# Altium PCB Sampler_DIOT.PCBDOC (part 7 of 9)
Units mm, origin at the board's own origin, x right, y up, seen from the top; angles counter-clockwise.
Board outline 222.17 x 100 mm, 4 copper layers (Top, GP1(GND), L3, Bot), stack 1.672 mm thick; 664 components, 411 nets, 2128 pads, 911 vias.
Unrouted connection lines stored in the file: 4.
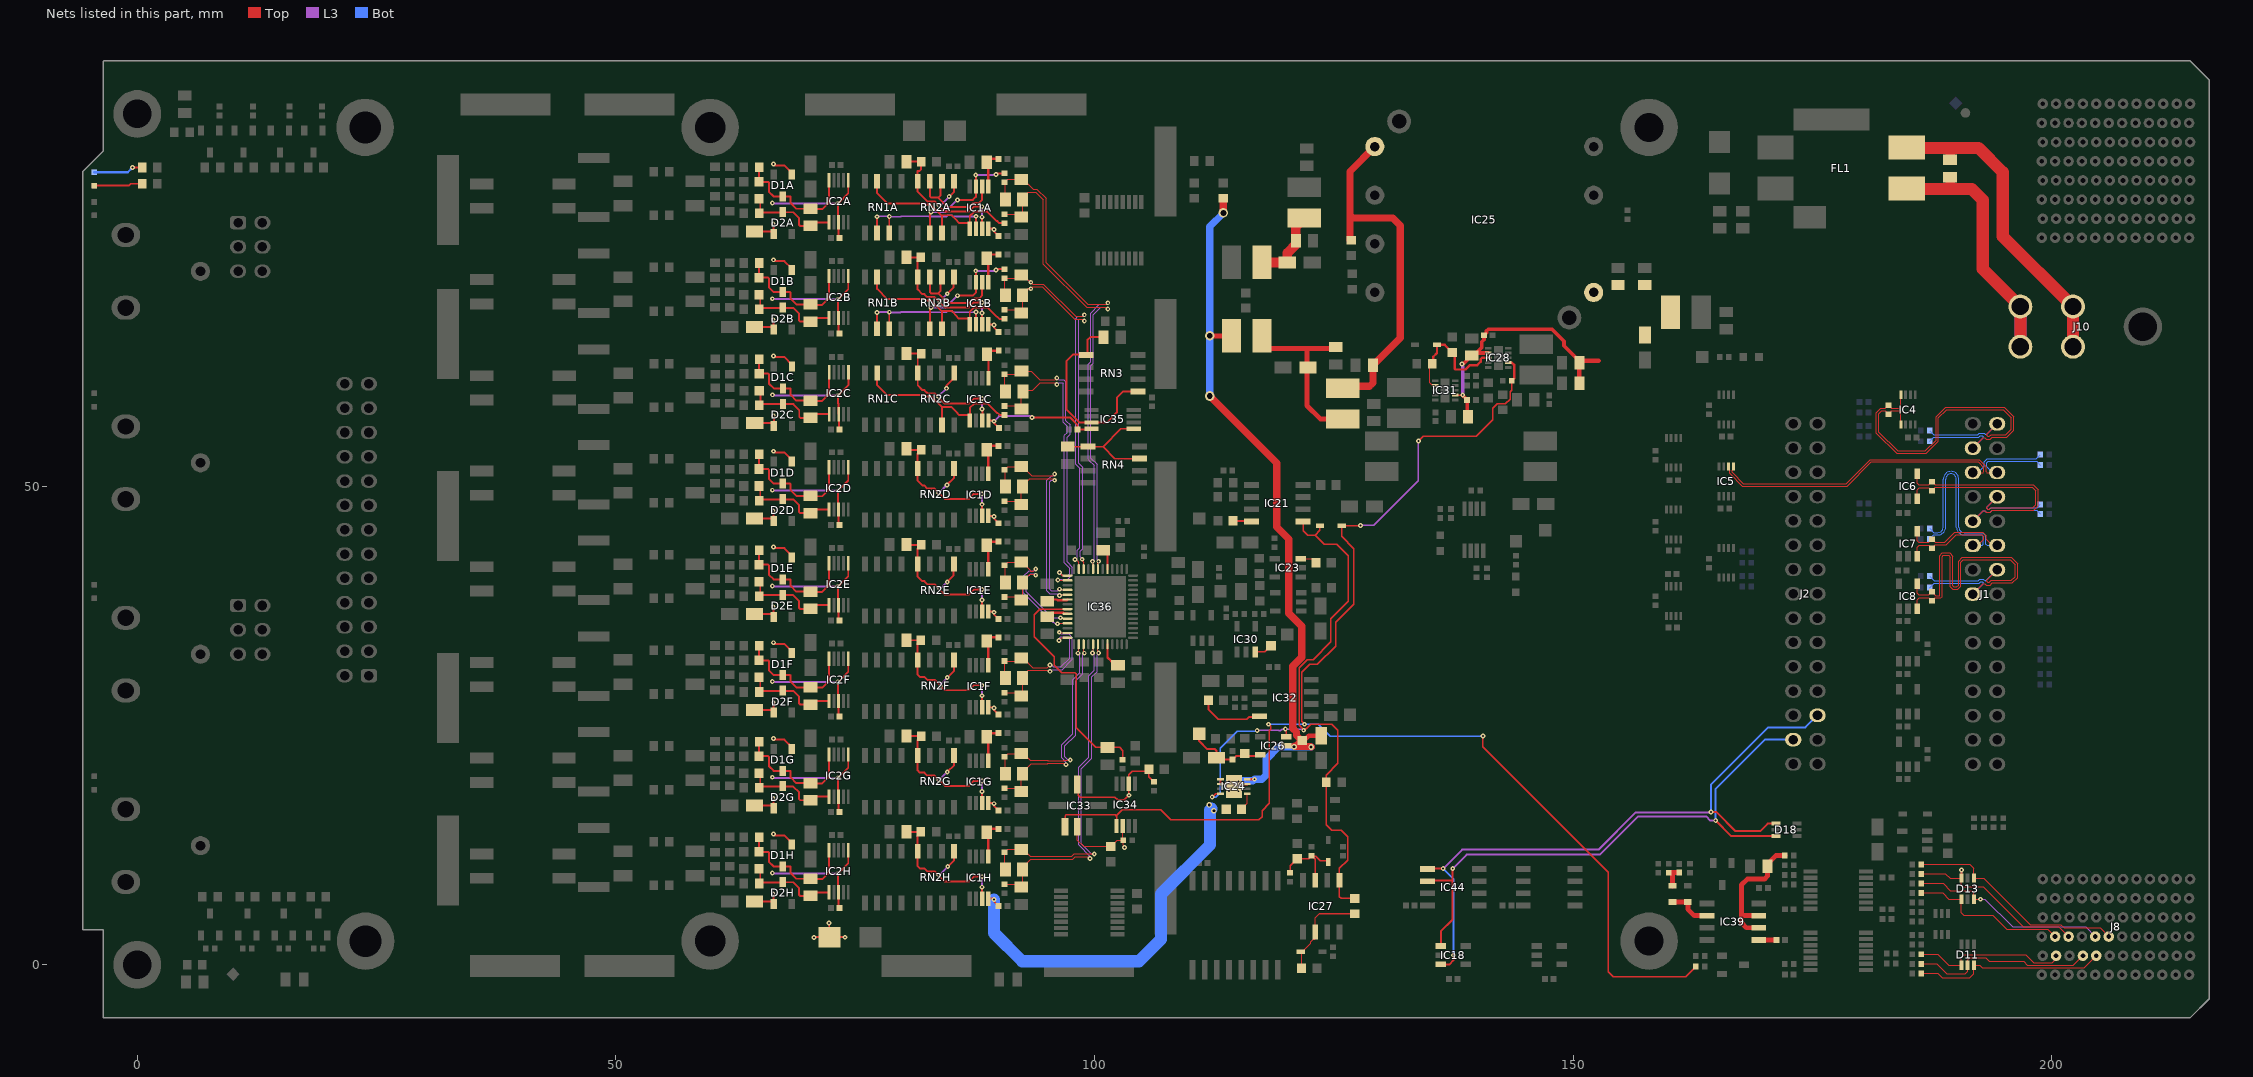
[diagram p7: the nets of this part, all layers, seen from the top]

## Via types
v1: diameter 0.5, hole 0.2, Top to Bot, tented both sides, 878 vias
v2: diameter 1, hole 0.6, Top to Bot, tented both sides, 18 vias
v3: diameter 0.6, hole 0.3, Top to Bot, tented both sides, 13 vias
v4: diameter 1.27, hole 0.711, Top to Bot, tented both sides, 2 vias

## Nets (pads, with @x,y where several pads share a name; then routed paths per layer and width w, separated by ;. In a path a pad name is that pad's centre, name@x,y a point inside that pad or via, vN(x,y) a via of type N, cw(c..) or ccw(c..) an arc to the next point about the centre after c; other vN are vias at no path point) (continued)
I2C_SCL1: D18.6 IC18.1 IC44.6 J2.27 | length 61.7
  Top w0.203: IC44.6@134.867,8.785 137.43,8.785 ; IC18.1@136.2,1.95 136.2,3.5 137.43,4.73 137.43,8.785 ; v1(137.43,10.055) 137.43,8.785 ; v1(164.9,15.075) 166.525,13.45 169.9,13.45 D18.6@171.2,13.45
  L3 w0.203: v1@137.318,9.943 v1(137.43,10.055) 138.885,11.51 152.81,11.51 156.8,15.5 163.9,15.5 164.331,15.069 164.519,15.069 164.894,15.069 v1(164.9,15.075)
  Bot w0.203: v1(164.9,15.075) 164.9,18.375 170.041,23.516 J2.27@173.002,23.516
I2C_SDA1: D18.4 IC18.3 IC44.5 J2.26 | length 68.4
  Top w0.203: IC44.5@134.867,10.055 v1(136.43,10.055) ; IC18.3@136.2,0.05 137.1,0.05 137.5,0.45 v1(137.5,1) ; v1(164.4,15.95) 165,15.95 166.975,13.975 169.547,13.975 170.322,14.75 D18.4@171.2,14.75
  L3 w0.203: v1(136.43,10.055) 138.411,12.036 152.661,12.036 156.55,15.925 164.375,15.925 v1(164.4,15.95)
  Bot w0.203: v1(136.43,10.055) 137.5,8.985 v1(137.5,1) ; v1(164.4,15.95) 164.4,18.825 170.375,24.8 174.286,24.8 J2.26@175.542,26.056
IN_0_N: C4A.2 C6A.2 IC36.47 R6A.2 | length 51.1
  Top w0.127: R6A.2@90.603,78.426 92.033,78.426 C4A.2@92.353,78.106 92.503,78.256 C6A.2@92.503,79.956 92.503,80.139 93.094,80.73 93.858,80.73 94.644,79.944 94.644,73.205 99.169,68.68 101.22,68.68 v1(101.394,68.506) ; IC36.47@100.364,41.34 100.364,42.079 v1(100.44,42.155)
  L3 w0.127: v1(100.44,42.155) 100.266,42.329 100.266,52.314 99.635,52.946 99.635,62.596 99.899,62.86 99.899,67.93 100.649,68.68 101.22,68.68 v1(101.394,68.506)
IN_0_P: C6A.1 C7A.1 IC36.48 R12A.2 | length 51.6
  Top w0.127: C6A.1@90.703,79.956 90.703,81.636 R12A.2@90.603,81.736 90.923,82.056 C7A.1@92.353,82.056 92.568,82.056 93.589,81.035 93.984,81.035 94.949,80.07 94.949,73.331 99.295,68.985 101.22,68.985 v1(101.394,69.159) ; v1(99.788,42.155) 99.864,42.079 IC36.48@99.864,41.34
  L3 w0.127: v1(99.788,42.155) 99.962,42.329 99.962,52.187 99.419,52.73 99.33,52.819 99.33,62.722 99.419,62.811 99.594,62.986 99.594,68.056 100.523,68.985 101.22,68.985 v1(101.394,69.159)
IN_1_N: C4B.2 C6B.2 IC36.50 R6B.2 | length 39.4
  Top w0.127: R6B.2@90.603,68.426 92.033,68.426 C4B.2@92.353,68.106 92.503,68.256 C6B.2@92.503,69.956 93.069,70.522 93.069,70.68 93.328,70.68 93.348,70.66 v1(93.348,70.634) 93.532,70.817 94.544,70.817 97.931,67.43 98.77,67.43 v1(98.944,67.256) ; v1(98.719,42.365) 98.719,42.224 98.864,42.079 IC36.50@98.864,41.34
  L3 w0.127: v1(98.719,42.365) 98.719,42.43 98.494,42.655 98.494,43.183 98.766,43.455 98.766,51.989 98.333,52.422 98.333,67.394 98.369,67.43 98.77,67.43 v1(98.944,67.256)
IN_1_P: C6B.1 C7B.1 IC36.51 R12B.2 | length 40
  Top w0.127: C6B.1@90.703,69.956 90.603,70.056 R12B.2@90.603,71.736 91.875,71.736 92.195,72.056 C7B.1@92.353,72.056 92.543,72.056 93.244,71.355 93.303,71.355 v1(93.353,71.305) 93.536,71.122 94.67,71.122 98.057,67.735 98.77,67.735 v1(98.944,67.909) ; v1(97.969,42.33) 98.113,42.33 98.24,42.202 98.24,42.167 98.364,42.044 IC36.51@98.364,41.34
  L3 w0.127: v1(97.969,42.33) 98.189,42.55 98.189,43.309 98.462,43.581 98.462,51.862 98.028,52.296 98.028,67.521 98.243,67.735 98.77,67.735 v1(98.944,67.909)
IN_2_N: C4C.2 C6C.2 IC36.1 R6C.2 | length 31.6
  Top w0.127: R6C.2@90.616,58.382 92.046,58.382 C4C.2@92.366,58.062 92.366,59.762 C6C.2@92.516,59.912 92.516,60.202 92.712,60.005 93.53,60.005 94.341,60.815 95.895,60.815 v1(96.069,60.641) ; v1(96.344,40.98) 96.644,40.68 96.644,40.665 IC36.1@97.189,40.665
  L3 w0.127: v1(96.069,60.641) 96.243,60.815 96.669,60.815 96.719,60.765 96.719,56.699 97.144,56.274 97.144,55.58 96.919,55.355 96.83,55.266 96.83,41.996 97.396,41.43 97.396,40.872 97.091,40.568 96.756,40.568 v1(96.344,40.98)
IN_2_P: C6C.1 C7C.1 IC36.2 R12C.2 | length 32.4
  Top w0.127: C6C.1@90.716,59.912 90.616,60.012 R12C.2@90.616,61.692 92.046,61.692 C7C.1@92.366,62.012 93.392,62.012 94.285,61.12 95.895,61.12 v1(96.069,61.294) ; v1(96.174,40.207) 96.328,40.207 96.37,40.165 IC36.2@97.189,40.165
  L3 w0.127: v1(96.069,61.294) 96.243,61.12 96.795,61.12 97.024,60.891 97.024,56.825 97.449,56.4 97.449,55.454 97.135,55.139 97.135,42.122 97.702,41.555 97.702,40.747 97.218,40.263 96.229,40.263 v1(96.174,40.207)
IN_3_N: C4D.2 C6D.2 IC36.4 R6D.2 | length 21.5
  Top w0.127: R6D.2@90.603,48.426 92.033,48.426 C4D.2@92.353,48.106 92.353,49.806 C6D.2@92.503,49.956 92.503,50.039 93.264,50.8 95.67,50.8 v1(95.844,50.626) ; v1(96.344,39.242) 96.42,39.165 IC36.4@97.189,39.165
  L3 w0.127: v1(95.844,50.626) 95.47,50.626 95.319,50.475 95.319,39.218 95.469,39.068 96.17,39.068 v1(96.344,39.242)
IN_3_P: C6D.1 C7D.1 IC36.5 R12D.2 | length 22.7
  Top w0.127: C6D.1@90.703,49.956 90.703,51.636 R12D.2@90.603,51.736 90.923,52.056 C7D.1@92.353,52.056 92.493,52.056 93.444,51.105 95.67,51.105 v1(95.844,51.279) ; v1(96.344,38.589) 96.42,38.665 IC36.5@97.189,38.665
  L3 w0.127: v1(95.844,51.279) 95.67,51.105 95.518,51.105 95.014,50.601 95.014,39.092 95.343,38.763 96.17,38.763 v1(96.344,38.589)
IN_4_N: C4E.2 C6E.2 IC36.10 R6E.2 | length 13
  Top w0.127: R6E.2@90.603,38.426 92.033,38.426 C4E.2@92.353,38.106 92.503,38.256 C6E.2@92.503,39.956 92.503,40.064 93.244,40.805 ; 93.218,40.805 93.244,40.805 ; v1(93.869,40.706) 93.77,40.805 93.244,40.805
  L3 w0.127: v1(93.869,40.706) 93.695,40.88 93.319,40.88 92.891,40.452 92.891,38.971 95.605,36.257 v1(96.449,36.257)
IN_4_P: C6E.1 C7E.1 IC36.11 R12E.2 | length 15
  Top w0.127: C6E.1@90.703,39.956 90.703,41.636 R12E.2@90.603,41.736 90.923,42.056 C7E.1@92.353,42.056 92.468,42.056 93.369,41.155 93.369,41.13 93.616,41.13 93.845,41.359 v1(93.869,41.359) ; v1(96.149,35.632) 96.182,35.665 IC36.11@97.189,35.665
  L3 w0.127: v1(93.869,41.359) 93.695,41.185 93.193,41.185 92.586,40.578 92.586,38.845 95.668,35.763 95.769,35.763 95.9,35.632 v1(96.149,35.632)
IN_5_N: C4F.2 C6F.2 IC36.13 R6F.2 | length 14.9
  Top w0.127: R6F.2@90.603,28.426 92.033,28.426 C4F.2@92.353,28.106 92.503,28.256 C6F.2@92.503,29.956 92.503,30.164 93.089,30.75 95.195,30.75 95.225,30.78 v1(95.349,30.657) ; v1(96.319,34.742) 96.395,34.665 IC36.13@97.189,34.665
  L3 w0.127: v1@95.225,30.78 95.27,30.825 96.62,30.825 97.699,31.904 97.699,34.184 97.315,34.568 96.493,34.568 v1(96.319,34.742)
IN_5_P: C6F.1 C7F.1 IC36.14 R12F.2 | length 14.2
  Top w0.127: C6F.1@90.703,29.956 90.603,30.056 R12F.2@90.603,31.736 92.033,31.736 C7F.1@92.353,32.056 92.568,32.056 93.569,31.055 95.069,31.055 v1(95.344,31.33) ; v1(96.294,33.88) 96.579,34.165 IC36.14@97.189,34.165
  L3 w0.127: v1(95.344,31.33) 95.494,31.33 95.694,31.13 96.494,31.13 97.394,32.03 97.394,34.058 97.189,34.263 96.493,34.263 96.294,34.064 v1(96.294,33.88)
IN_6_N: C4G.2 C6G.2 IC36.16 R6G.2 | length 22.6
  Top w0.127: R6G.2@90.603,18.426 92.033,18.426 C4G.2@92.353,18.106 92.353,19.806 C6G.2@92.503,19.956 92.503,20.114 93.414,21.025 95.119,21.025 95.132,21.038 96.892,21.038 v1(97.024,20.906) ; v1(98.288,32.555) 98.364,32.631 IC36.16@98.364,33.49
  L3 w0.127: v1(97.024,20.906) 97.024,21.166 96.664,21.525 96.575,21.614 96.575,22.986 96.664,23.075 97.714,24.125 97.714,29.786 98.462,30.533 98.462,32.381 v1(98.288,32.555)
IN_6_P: C6G.1 C7G.1 IC36.17 R12G.2 | length 22.5
  Top w0.127: C6G.1@90.703,19.956 90.703,21.636 R12G.2@90.603,21.736 90.923,22.056 C7G.1@92.353,22.056 92.568,22.056 93.269,21.355 95.119,21.355 95.132,21.342 96.769,21.342 96.811,21.385 97.452,21.385 v1(97.474,21.406) ; IC36.17@98.864,33.49 98.864,32.631 v1(98.94,32.555)
  L3 w0.127: v1(97.474,21.406) 97.214,21.406 96.88,21.741 96.88,22.86 98.019,23.999 98.019,29.66 98.766,30.407 98.766,32.381 v1(98.94,32.555)
IN_7_N: C4H.2 C6H.2 IC36.19 R6H.2 | length 35.2
  Top w0.127: R6H.2@90.603,8.426 92.033,8.426 C4H.2@92.353,8.106 92.503,8.256 C6H.2@92.503,9.956 92.503,10.164 93.351,11.012 97.732,11.012 97.999,11.279 99.345,11.279 v1(99.519,11.105) ; v1(99.788,32.58) 99.864,32.656 IC36.19@99.864,33.49
  L3 w0.127: v1(99.519,11.105) 99.519,11.351 98.339,12.531 98.339,20.625 99.414,21.7 99.414,30.2 99.962,30.748 99.962,32.406 v1(99.788,32.58)
IN_7_P: C6H.1 C7H.1 IC36.20 R12H.2 | length 35.2
  Top w0.127: C6H.1@90.703,9.956 90.603,10.056 R12H.2@90.603,11.736 90.923,12.056 C7H.1@92.353,12.056 92.429,11.98 92.644,11.98 93.307,11.317 97.606,11.317 97.873,11.584 99.717,11.584 99.735,11.566 v1(99.98,11.566) ; IC36.20@100.364,33.49 100.364,32.656 v1(100.44,32.58)
  L3 w0.127: v1(99.98,11.566) 99.735,11.566 98.644,12.657 98.644,20.499 99.719,21.574 99.719,30.074 100.266,30.621 100.266,32.406 v1(100.44,32.58)
LVDS_DUAL_N0: IC4.1 J1.3 R14.1 R138.2 | length 38.8
  Top w0.127: R14.1@182.949,57.53 182.606,57.873 182.273,57.873 181.95,57.55 181.95,55.65 183.9,53.7 186.8,53.7 187.922,54.822 187.922,57.255 188.93,58.263 195.062,58.263 196.054,57.27 196.054,55.845 195.326,55.117 193.788,55.117 193.571,54.9 193.171,54.9 193.021,55.05 192.852,55.05 J1.3@191.772,53.97 ; R14.1@182.969,57.53 183.196,57.757 183.196,57.799 183.27,57.873 184.175,57.873 184.25,57.799 IC4.1@184.25,56.45
  Bot w0.127: R138.2@187.27,54.7 187.695,55.125 192.375,55.125 192.525,55.275 192.537,55.275 192.543,55.281 192.75,55.281 192.864,55.167 192.864,55.062 J1.3@191.772,53.97
LVDS_DUAL_N1: IC5.5 J1.6 R139.2 | length 38.4
  Top w0.127: IC5.5@166.75,52.05 166.75,51.775 166.627,51.652 166.627,51.448 167.8,50.275 178.54,50.275 181.056,52.79 192.435,52.79 193.169,52.056 193.169,51.505 193.244,51.43 J1.6@194.312,51.43
  Bot w0.127: J1.6@194.312,51.43 193.82,51.43 193.204,52.046 193.204,52.429 193.375,52.6 198.43,52.6 R139.2@198.83,52.2
LVDS_DUAL_N2: IC6.4 J1.9 R15.1 R140.2 | length 31.3
  Top w0.127: IC6.4@185.95,51.3 185.95,50.324 186.122,50.152 187.182,50.152 R15.1@187.5,50.47 187.82,50.15 193.527,50.15 198.075,50.15 198.581,49.644 198.581,47.943 198.134,47.496 193.787,47.496 193.571,47.28 193.171,47.28 193.021,47.43 192.852,47.43 J1.9@191.772,46.35
  Bot w0.127: J1.9@191.772,46.35 192.852,47.43 193.021,47.43 193.171,47.28 193.58,47.28 193.796,47.496 198.434,47.496 R140.2@198.83,47.1
LVDS_DUAL_N3: IC7.4 J1.12 R16.1 R141.2 | length 30.8
  Top w0.127: IC7.4@185.95,45.3 185.95,44.324 186.122,44.152 187.182,44.152 R16.1@187.5,44.47 187.845,44.125 188.85,44.125 189.898,45.173 192.802,45.173 193.154,44.821 193.154,44.452 193.796,43.81 J1.12@194.312,43.81
  Bot w0.127: R141.2@187.27,45.6 187.71,45.16 187.922,45.16 188.113,45.16 ccw(c188.113,45.724) 188.676,45.724 188.676,50.728 cw(c189.494,50.728) 189.494,51.545 cw(c189.494,50.728) 190.311,50.728 190.311,45.724 ccw(c190.875,45.724) 190.875,45.16 191.922,45.16 192.814,45.16 193.125,44.85 193.125,43.95 193.265,43.81 J1.12@194.312,43.81
LVDS_DUAL_N4: IC8.4 J1.15 R17.1 R142.2 | length 37
  Top w0.127: IC8.4@185.95,39.8 185.95,38.824 186.122,38.652 187.182,38.652 R17.1@187.5,38.97 187.895,38.575 188.305,38.575 188.305,42.755 188.575,43.025 189.35,43.025 189.675,42.7 189.675,39.584 189.759,39.5 190.1,39.5 190.275,39.675 190.275,42.17 190.683,42.578 195.782,42.578 196.446,41.913 196.446,40.446 195.896,39.896 193.807,39.896 193.571,39.66 193.171,39.66 193.021,39.81 192.852,39.81 J1.15@191.772,38.73
  Bot w0.127: R142.2@187.27,39.4 187.735,39.865 192.425,39.865 192.6,40.041 192.75,40.041 192.864,39.927 192.864,39.822 J1.15@191.772,38.73
LVDS_DUAL_P0: IC4.8 J1.2 R14.2 R122.2 | length 38.8
  Top w0.127: R14.2@182.949,58.47 182.606,58.127 182.168,58.127 181.696,57.655 181.696,55.545 183.795,53.446 186.905,53.446 188.176,54.717 188.176,57.15 189.035,58.009 194.956,58.009 195.8,57.165 195.8,55.95 195.224,55.374 193.67,55.374 193.496,55.2 193.335,55.2 193.221,55.314 193.221,55.419 J1.2@194.312,56.51 ; R14.2@182.969,58.47 183.196,58.244 183.196,58.201 183.27,58.127 184.175,58.127 184.25,58.201 IC4.8@184.25,59.55
  Bot w0.127: R122.2@187.27,55.8 187.496,55.574 187.691,55.379 192.27,55.379 192.441,55.55 192.945,55.55 193.064,55.431 193.233,55.431 J1.2@194.312,56.51
LVDS_DUAL_P1: IC5.6 J1.5 R123.2 | length 38.8
  Top w0.127: IC5.6@166.25,52.05 166.25,51.775 166.373,51.652 166.373,51.343 167.695,50.021 178.646,50.021 181.161,52.536 192.33,52.536 192.915,51.95 192.915,51.505 192.841,51.43 J1.5@191.772,51.43
  Bot w0.127: J1.5@191.772,51.43 192.28,51.43 192.95,52.1 192.95,52.527 192.95,52.534 193.27,52.854 198.384,52.854 R123.2@198.83,53.3
LVDS_DUAL_P2: IC6.3 J1.8 R15.2 R124.2 | length 29.8
  Top w0.127: IC6.3@185.95,48.7 185.95,49.644 186.154,49.848 187.182,49.848 R15.2@187.5,49.53 187.866,49.896 193.527,49.896 197.97,49.896 198.327,49.538 198.327,48.048 198.029,47.75 193.666,47.75 193.496,47.58 193.335,47.58 193.221,47.694 193.221,47.799 J1.8@194.312,48.89
  Bot w0.127: J1.8@194.312,48.89 193.221,47.799 193.221,47.694 193.335,47.58 193.505,47.58 193.675,47.75 198.48,47.75 R124.2@198.83,48.1
LVDS_DUAL_P3: IC7.3 J1.11 R16.2 R125.2 | length 29.8
  Top w0.127: IC7.3@185.95,42.7 185.95,43.644 186.154,43.848 187.182,43.848 R16.2@187.5,43.53 187.841,43.871 188.977,43.871 190.025,44.919 192.697,44.919 192.9,44.716 192.9,44.45 192.26,43.81 J1.11@191.772,43.81
  Bot w0.127: R125.2@187.27,44.5 187.676,44.906 187.922,44.906 188.113,44.906 ccw(c188.113,45.724) 188.93,45.724 188.93,50.728 cw(c189.494,50.728) 189.494,51.291 cw(c189.494,50.728) 190.057,50.728 190.057,45.724 ccw(c190.875,45.724) 190.875,44.906 191.922,44.906 192.709,44.906 192.712,44.904 192.871,44.745 192.871,43.946 192.735,43.81 J1.11@191.772,43.81
LVDS_DUAL_P4: IC8.3 J1.14 R17.2 R126.2 | length 36.1
  Top w0.127: IC8.3@185.95,37.2 185.95,38.144 186.154,38.348 187.182,38.348 R17.2@187.5,38.03 187.791,38.321 188.411,38.321 188.559,38.47 188.559,42.65 188.68,42.771 189.245,42.771 189.421,42.595 189.421,39.479 189.654,39.246 190.205,39.246 190.529,39.57 190.529,42.065 190.788,42.324 195.676,42.324 196.192,41.808 196.192,40.551 195.791,40.15 193.686,40.15 193.496,39.96 193.335,39.96 193.221,40.074 193.221,40.179 J1.14@194.312,41.27
  Bot w0.127: R126.2@187.27,40.6 187.751,40.119 192.319,40.119 192.5,40.3 192.85,40.3 193.05,40.1 193.142,40.1 J1.14@194.312,41.27
MP: D22.1 R35.1 | length 5.1
  Top w0.203: D22.1@-4.52,81.4 D22.1@-4.49,81.4 -0.9,81.4 -0.7,81.6 R35.1@0.5,81.6
N12V0A: C10A.2 C10B.2 C10C.2 C10D.2 C10E.2 C10F.2 C10G.2 C10H.2 C11A.2 C11B.2 C11C.2 C11D.2 C11E.2 C11F.2 C11G.2 C11H.2 C14A.2 C14B.2 C14C.2 C14D.2 C14E.2 C14F.2 C14G.2 C14H.2 C46.2 C63.2 C64.2 C105.2 D1A.1 D1B.1 D1C.1 D1D.1 D1E.1 D1F.1 D1G.1 D1H.1 D2A.1 D2B.1 D2C.1 D2D.1 D2E.1 D2F.1 D2G.1 D2H.1 D6.2 IC1A.4 IC1B.4 IC1C.4 IC1D.4 IC1E.4 IC1F.4 IC1G.4 IC1H.4 IC2A.3 IC2A.6 IC2B.3 IC2B.6 IC2C.3 IC2C.6 IC2D.3 IC2D.6 IC2E.3 IC2E.6 IC2F.3 IC2F.6 IC2G.3 IC2G.6 IC2H.3 IC2H.6 IC24.1 IC24.2 IC26.5 IC35.4 R61.2 TP9.1 | length 230.1
  Top w0.203: C11H.2@64.494,6.63 66.209,6.63 D2H.1@66.483,6.356 66.483,7.356 v1(66.444,7.395) ; C11G.2@64.494,16.63 66.209,16.63 D2G.1@66.483,16.356 66.483,17.356 v1(66.444,17.395) ; C11F.2@64.494,26.63 66.209,26.63 D2F.1@66.483,26.356 66.483,27.356 v1(66.444,27.395) ; C11E.2@64.494,36.63 66.209,36.63 D2E.1@66.483,36.356 66.483,37.356 v1(66.444,37.395) ; C11D.2@64.494,46.63 66.209,46.63 D2D.1@66.483,46.356 66.483,47.356 v1(66.444,47.395) ; C11B.2@64.494,66.63 66.209,66.63 D2B.1@66.483,66.356 66.483,67.356 v1(66.444,67.395) ; C11A.2@64.494,76.63 66.209,76.63 D2A.1@66.483,76.356 66.483,77.356 v1(66.444,77.395) ; C11C.2@64.507,56.586 66.222,56.586 D2C.1@66.496,56.312 66.496,57.312 v1(66.457,57.352) ; v1(66.468,13.653) 66.595,13.526 67.611,13.526 68.383,12.754 D1H.1@68.383,12.641 ; v1(66.468,23.653) 66.595,23.526 67.611,23.526 68.383,22.754 D1G.1@68.383,22.641 ; v1(66.468,33.653) 66.595,33.526 67.611,33.526 68.383,32.754 D1F.1@68.383,32.641 ; v1(66.468,43.653) 66.595,43.526 67.611,43.526 68.383,42.754 D1E.1@68.383,42.641 ; v1(66.468,53.653) 66.595,53.526 67.611,53.526 68.383,52.754 D1D.1@68.383,52.641 ; v1(66.468,73.653) 66.595,73.526 67.611,73.526 68.383,72.754 D1B.1@68.383,72.641 ; v1(66.468,83.653) 66.595,83.526 67.611,83.526 68.383,82.754 D1A.1@68.383,82.641 ; v1(66.481,63.609) 66.608,63.482 67.624,63.482 68.396,62.71 D1C.1@68.396,62.597 ; D1H.1@68.383,12.568 D1H.1@68.383,12.641 ; D1G.1@68.383,22.568 D1G.1@68.383,22.641 ; D1F.1@68.383,32.568 D1F.1@68.383,32.641 ; D1E.1@68.383,42.568 D1E.1@68.383,42.641 ; D1D.1@68.383,52.568 D1D.1@68.383,52.641 ; D1B.1@68.383,72.568 D1B.1@68.383,72.641 ; D1A.1@68.383,82.568 D1A.1@68.383,82.641 ; D1C.1@68.396,62.524 D1C.1@68.396,62.597 ; D1H.1@68.455,12.688 68.396,12.628 D1H.1@68.383,12.641 ; D1G.1@68.455,22.688 68.396,22.628 D1G.1@68.383,22.641 ; D1F.1@68.455,32.688 68.396,32.628 D1F.1@68.383,32.641 ; D1E.1@68.455,42.688 68.396,42.628 D1E.1@68.383,42.641 ; D1D.1@68.455,52.688 68.396,52.628 D1D.1@68.383,52.641 ; D1B.1@68.455,72.688 68.396,72.628 D1B.1@68.383,72.641 ; D1A.1@68.455,82.688 68.396,82.628 D1A.1@68.383,82.641 ; D1C.1@68.468,62.644 68.408,62.585 D1C.1@68.396,62.597 ; v1(70.707,2.836) 70.75,2.88 D6.2@72.294,2.88 ; v1(72.269,4.38) 72.269,4.405 72.294,4.38 D6.2@72.294,2.88 ; C10H.2@73.215,6.098 C10H.2@73.275,6.038 ; C10G.2@73.215,16.098 C10G.2@73.275,16.038 ; C10F.2@73.215,26.098 C10F.2@73.275,26.038 ; C10E.2@73.215,36.098 C10E.2@73.275,36.038 ; C10D.2@73.215,46.098 C10D.2@73.275,46.038 ; C10B.2@73.215,66.098 C10B.2@73.275,66.038 ; C10A.2@73.215,76.098 C10A.2@73.275,76.038 ; C10C.2@73.228,56.054 C10C.2@73.288,55.994 ; C10H.2@73.365,5.948 C10H.2@73.275,6.038 ; C10G.2@73.365,15.948 C10G.2@73.275,16.038 ; C10F.2@73.365,25.948 C10F.2@73.275,26.038 ; C10E.2@73.365,35.948 C10E.2@73.275,36.038 ; C10D.2@73.365,45.948 C10D.2@73.275,46.038 ; C10B.2@73.365,65.948 C10B.2@73.275,66.038 ; C10A.2@73.365,75.948 C10A.2@73.275,76.038 ; C10C.2@73.378,55.904 C10C.2@73.288,55.994 ; v1(73.944,2.88) D6.2@72.294,2.88 ; IC2H.6@74.275,11.967 74.275,10.596 v1(73.215,9.536) 73.215,8.7 73.227,8.688 73.227,7.615 73.275,7.567 C10H.2@73.275,6.038 ; IC2G.6@74.275,21.967 74.275,20.596 v1(73.215,19.536) 73.215,18.7 73.227,18.688 73.227,17.615 73.275,17.567 C10G.2@73.275,16.038 ; IC2F.6@74.275,31.967 74.275,30.596 v1(73.215,29.536) 73.215,28.7 73.227,28.688 73.227,27.615 73.275,27.567 C10F.2@73.275,26.038 ; IC2E.6@74.275,41.967 74.275,40.596 v1(73.215,39.536) 73.215,38.7 73.227,38.688 73.227,37.615 73.275,37.567 C10E.2@73.275,36.038 ; IC2D.6@74.275,51.967 74.275,50.596 v1(73.215,49.536) 73.215,48.7 73.227,48.688 73.227,47.615 73.275,47.567 C10D.2@73.275,46.038 ; IC2B.6@74.275,71.967 74.275,70.596 v1(73.215,69.536) 73.215,68.7 73.227,68.688 73.227,67.615 73.275,67.567 C10B.2@73.275,66.038 ; IC2A.6@74.275,81.967 74.275,80.596 v1(73.215,79.536) 73.215,78.7 73.227,78.688 73.227,77.615 73.275,77.567 C10A.2@73.275,76.038 ; IC2C.6@74.288,61.923 74.288,60.553 v1(73.228,59.493) 73.228,58.656 73.239,58.644 73.239,57.571 IC2C.3@73.288,57.523 C10C.2@73.288,55.994 ; IC1H.4@88.919,6.909 89.415,6.909 v1(89.494,6.83) 89.494,6.63 C14H.2@89.994,6.13 ; IC1G.4@88.919,16.909 89.415,16.909 v1(89.494,16.83) 89.494,16.63 C14G.2@89.994,16.13 ; IC1F.4@88.919,26.909 89.415,26.909 v1(89.494,26.83) 89.494,26.63 C14F.2@89.994,26.13 ; IC1E.4@88.919,36.909 89.415,36.909 v1(89.494,36.83) 89.494,36.63 C14E.2@89.994,36.13 ; IC1D.4@88.919,46.909 89.415,46.909 v1(89.494,46.83) 89.494,46.63 C14D.2@89.994,46.13 ; IC1B.4@88.919,66.909 89.415,66.909 v1(89.494,66.83) 89.494,66.63 C14B.2@89.994,66.13 ; IC1A.4@88.919,76.909 89.415,76.909 v1(89.494,76.83) 89.494,76.63 C14A.2@89.994,76.13 ; IC1C.4@88.932,56.865 89.428,56.865 v1(89.507,56.786) 89.507,56.586 C14C.2@90.007,56.086 ; v1(93.469,57.18) 97.444,57.18 98.244,56.38 98.219,56.355 C105.2@98.219,55.905 99.594,55.905 IC35.4@99.694,56.005 ; TP9.1@110.944,24.13 110.944,23.38 111.794,22.53 112.594,22.53 112.744,22.38 112.744,21.63 112.944,21.43 C64.2@114.444,21.43 114.805,21.791 117.078,21.791 IC26.5@117.217,21.93
  Top w0.254: IC24.2@113.169,18.884 IC24.1@113.169,19.384
  L3 w0.203: v1(66.341,9.589) 66.394,9.536 v1(73.215,9.536) ; v1(66.341,19.589) 66.394,19.536 v1(73.215,19.536) ; v1(66.341,29.589) 66.394,29.536 v1(73.215,29.536) ; v1(66.341,39.589) 66.394,39.536 v1(73.215,39.536) ; v1(66.341,49.589) 66.394,49.536 v1(73.215,49.536) ; v1(66.341,69.589) 66.394,69.536 v1(73.215,69.536) ; v1(66.341,79.589) 66.394,79.536 v1(73.215,79.536) ; v1(66.354,59.545) 66.406,59.493 v1(73.228,59.493) ; v1(89.507,56.786) 90.035,57.315 93.334,57.315 v1(93.469,57.18)
  Bot w1.27: v1(89.494,6.83) 89.494,3.33 92.456,0.368 104.65,0.368 106.944,2.662 106.944,7.393 112.088,12.536 112.088,16.174 112.219,16.305
  other v3: 112.47,16.089 111.994,16.707
N13V0: C61.2 C62.2 IC24.7 IC24.8 IC24.9 IC26.2 L6.2 R42.2 | length 82.6
  Top w0.254: v1(115.069,19.134) 115.069,19.082 115.267,18.884 IC24.7@115.969,18.884 ; IC24.8@115.969,19.384 v1(116.724,19.384)
  Top w0.508: v2(112.05,65.725) 112.075,65.7 L6.2@114.2,65.7 ; IC26.2@120.044,22.88 v3@120.919,22.88 ; C61.2@121.719,23.43 121.886,23.43 122.386,23.93 C62.2@123.694,23.93
  Top w0.762: v2(112.05,59.425) 119.044,52.431 119.044,45.748 120.3,44.492 120.3,36.715 121.28,35.735 121.28,35.724 121.644,35.36 121.644,32.122 120.707,31.185 120.707,24.71 121.102,24.315 121.102,23.956 121.628,23.43 121.669,23.43 121.069,22.83 120.919,22.83 120.936,22.813 122.592,22.813 v3(122.641,22.764) ; R42.2@113.444,80.08 113.444,78.581 v2@113.475,78.55
  Bot w0.762: v2(112.05,59.425) 112.05,63.925 v2(112.05,65.725) 112.05,77.125 v2@113.475,78.55 ; v1(114.069,19.134) v1(115.069,19.134) v1@115.069,19.334 ; 115.418,19.227 116.568,19.227 v1(116.724,19.384) 117.498,19.384 117.944,19.83 117.944,21.484 119.224,22.764 v3(122.641,22.764)
  other v1: 114.069,18.134 115.069,18.134
  other v2: 113.475,78.555
  other v3: 120.866,22.785
N13V0S: C58.2 IC25.4 L5.1 R58.1 | length 42.8
  Top w0.203: L5.1@125.944,60.23 128.544,60.23 128.744,60.43 128.944,60.63 128.944,62.48 C58.2@129.094,62.63
  Top w0.762: L5.1@125.944,60.23 126.144,60.43 128.744,60.43 ; R58.1@126.694,75.68 126.763,75.749 R58.1@126.813,75.749 ; R58.1@126.813,75.699 126.763,75.699 126.738,75.724 126.694,75.768 126.694,78.33 ; 128.944,60.63 129.094,60.78 C58.2@129.094,62.63 131.194,64.73 131.944,65.48 131.944,77.235 131.149,78.03 126.994,78.03 126.694,78.33 ; IC25.4@129.294,85.485 126.694,82.885 126.694,78.33
NetC1A_2: C1A.2 C2A.2 D1A.3 IC2A.10 R3A.2 | length 13.5
  Top w0.203: R3A.2@64.962,83.322 C1A.2@64.962,81.798 65.903,81.798 65.983,81.718 65.983,80.768 66.483,80.268 D1A.3@67.433,80.268 68.202,80.268 68.246,80.224 68.246,79.589 68.845,78.99 C2A.2@70.329,78.99 70.365,78.954 71.548,78.954 72.275,79.681 IC2A.10@72.275,81.967
NetC1B_2: C1B.2 C2B.2 D1B.3 IC2B.10 R3B.2 | length 13.5
  Top w0.203: R3B.2@64.962,73.322 C1B.2@64.962,71.798 65.903,71.798 65.983,71.718 65.983,70.768 66.483,70.268 D1B.3@67.433,70.268 68.202,70.268 68.246,70.224 68.246,69.589 68.845,68.99 C2B.2@70.329,68.99 70.365,68.954 71.548,68.954 72.275,69.681 IC2B.10@72.275,71.967
NetC1C_2: C1C.2 C2C.2 D1C.3 IC2C.10 R3C.2 | length 13.5
  Top w0.203: R3C.2@64.975,63.278 C1C.2@64.975,61.754 65.916,61.754 65.996,61.674 65.996,60.724 66.496,60.224 D1C.3@67.446,60.224 68.215,60.224 68.259,60.18 68.259,59.545 68.857,58.947 C2C.2@70.341,58.947 70.378,58.91 71.561,58.91 72.288,59.637 IC2C.10@72.288,61.923
NetC1D_2: C1D.2 C2D.2 D1D.3 IC2D.10 R3D.2 | length 13.5
  Top w0.203: R3D.2@64.962,53.322 C1D.2@64.962,51.798 65.903,51.798 65.983,51.718 65.983,50.768 66.483,50.268 D1D.3@67.433,50.268 68.202,50.268 68.246,50.224 68.246,49.589 68.845,48.99 C2D.2@70.329,48.99 70.365,48.954 71.548,48.954 72.275,49.681 IC2D.10@72.275,51.967
NetC1E_2: C1E.2 C2E.2 D1E.3 IC2E.10 R3E.2 | length 13.5
  Top w0.203: R3E.2@64.962,43.322 C1E.2@64.962,41.798 65.903,41.798 65.983,41.718 65.983,40.768 66.483,40.268 67.433,40.268 68.202,40.268 68.246,40.224 68.246,39.589 68.845,38.99 C2E.2@70.329,38.99 70.365,38.954 71.548,38.954 72.275,39.681 IC2E.10@72.275,41.967
NetC1F_2: C1F.2 C2F.2 D1F.3 IC2F.10 R3F.2 | length 13.5
  Top w0.203: R3F.2@64.962,33.322 C1F.2@64.962,31.798 65.903,31.798 65.983,31.718 65.983,30.768 66.483,30.268 D1F.3@67.433,30.268 68.202,30.268 68.246,30.224 68.246,29.589 68.845,28.99 C2F.2@70.329,28.99 70.365,28.954 71.548,28.954 72.275,29.681 IC2F.10@72.275,31.967
NetC1G_2: C1G.2 C2G.2 D1G.3 IC2G.10 R3G.2 | length 13.5
  Top w0.203: R3G.2@64.962,23.322 C1G.2@64.962,21.798 65.903,21.798 65.983,21.718 65.983,20.768 66.483,20.268 D1G.3@67.433,20.268 68.202,20.268 68.246,20.224 68.246,19.589 68.845,18.99 C2G.2@70.329,18.99 70.365,18.954 71.548,18.954 72.275,19.681 IC2G.10@72.275,21.967
NetC1H_2: C1H.2 C2H.2 D1H.3 IC2H.10 R3H.2 | length 13.5
  Top w0.203: R3H.2@64.962,13.322 C1H.2@64.962,11.798 65.903,11.798 65.983,11.718 65.983,10.768 66.483,10.268 D1H.3@67.433,10.268 68.202,10.268 68.246,10.224 68.246,9.589 68.845,8.99 C2H.2@70.329,8.99 70.365,8.954 71.548,8.954 72.275,9.681 IC2H.10@72.275,11.967
NetC2A_1: C2A.1 C5A.2 D2A.3 IC2A.1 R10A.2 | length 9.7
  Top w0.203: C5A.2@65.082,79.9 65.082,78.616 67.393,78.616 D2A.3@67.399,78.622 ; D2A.3@67.433,78.656 D2A.3@67.399,78.622 ; IC2A.1@72.275,77.567 70.705,77.567 C2A.1@70.329,77.19 69.249,77.19 69.142,77.298 69.142,78.004 68.524,78.622 D2A.3@67.399,78.622
NetC2B_1: C2B.1 C5B.2 D2B.3 IC2B.1 R10B.2 | length 9.7
  Top w0.203: C5B.2@65.082,69.9 65.082,68.616 67.393,68.616 D2B.3@67.399,68.622 ; D2B.3@67.433,68.656 D2B.3@67.399,68.622 ; IC2B.1@72.275,67.567 70.705,67.567 C2B.1@70.329,67.19 69.249,67.19 69.142,67.298 69.142,68.004 68.524,68.622 D2B.3@67.399,68.622
NetC2C_1: C2C.1 C5C.2 D2C.3 IC2C.1 R10C.2 | length 9.7
  Top w0.203: C5C.2@65.095,59.856 65.095,58.572 67.406,58.572 D2C.3@67.412,58.578 ; D2C.3@67.446,58.612 D2C.3@67.412,58.578 ; IC2C.1@72.288,57.523 70.718,57.523 C2C.1@70.341,57.147 69.262,57.147 69.154,57.254 69.154,57.96 68.536,58.578 D2C.3@67.412,58.578
NetC2D_1: C2D.1 C5D.2 D2D.3 IC2D.1 R10D.2 | length 9.7
  Top w0.203: C5D.2@65.082,49.9 65.082,48.616 67.393,48.616 D2D.3@67.399,48.622 ; D2D.3@67.433,48.656 D2D.3@67.399,48.622 ; IC2D.1@72.275,47.567 70.705,47.567 C2D.1@70.329,47.19 69.249,47.19 69.142,47.298 69.142,48.004 68.524,48.622 D2D.3@67.399,48.622
NetC2E_1: C2E.1 C5E.2 D2E.3 IC2E.1 R10E.2 | length 9.7
  Top w0.203: C5E.2@65.082,39.9 65.082,38.616 67.393,38.616 D2E.3@67.399,38.622 ; D2E.3@67.433,38.656 D2E.3@67.399,38.622 ; IC2E.1@72.275,37.567 70.705,37.567 C2E.1@70.329,37.19 69.249,37.19 69.142,37.298 69.142,38.004 68.524,38.622 D2E.3@67.399,38.622
NetC2F_1: C2F.1 C5F.2 D2F.3 IC2F.1 R10F.2 | length 9.7
  Top w0.203: C5F.2@65.082,29.9 65.082,28.616 67.393,28.616 D2F.3@67.399,28.622 ; D2F.3@67.433,28.656 D2F.3@67.399,28.622 ; IC2F.1@72.275,27.567 70.705,27.567 C2F.1@70.329,27.19 69.249,27.19 69.142,27.298 69.142,28.004 68.524,28.622 D2F.3@67.399,28.622
NetC2G_1: C2G.1 C5G.2 D2G.3 IC2G.1 R10G.2 | length 9.7
  Top w0.203: C5G.2@65.082,19.9 65.082,18.616 67.393,18.616 D2G.3@67.399,18.622 ; D2G.3@67.433,18.656 D2G.3@67.399,18.622 ; IC2G.1@72.275,17.567 70.705,17.567 C2G.1@70.329,17.19 69.249,17.19 69.142,17.298 69.142,18.004 68.524,18.622 D2G.3@67.399,18.622
NetC2H_1: C2H.1 C5H.2 D2H.3 IC2H.1 R10H.2 | length 9.7
  Top w0.203: C5H.2@65.082,9.9 65.082,8.616 67.393,8.616 D2H.3@67.399,8.622 ; D2H.3@67.433,8.656 D2H.3@67.399,8.622 ; IC2H.1@72.275,7.567 70.705,7.567 C2H.1@70.329,7.19 69.249,7.19 69.142,7.298 69.142,8.004 68.524,8.622 D2H.3@67.399,8.622
NetC3A_2: C3A.2 IC1A.3 R7A.2 RN2A.1 RN2A.4 | length 18.6
  Top w0.203: C3A.2@80.369,83.655 C3A.2@80.369,83.905 81.869,83.905 R7A.2@81.894,83.88 81.894,83.105 81.739,82.95 81.524,82.95 RN2A.4@81.524,81.855 81.524,80.775 82.544,79.755 83.294,79.755 v1@83.694,79.355 ; v1(83.744,79.355) v1@83.694,79.355 ; v1(84.819,80.255) 85.334,80.77 RN2A.1@85.334,81.855 ; v1(88.244,79.205) 87.394,79.205 86.869,78.68 84.369,78.68 v1@83.694,79.355 ; v1(88.248,78.109) 88.269,78.088 IC1A.3@88.269,76.909
  L3 w0.203: v1(83.744,79.355) 83.919,79.355 v1(84.819,80.255) ; v1(88.244,79.205) 88.248,79.201 v1(88.248,78.109)
NetC3B_2: C3B.2 IC1B.3 R7B.2 RN2B.1 RN2B.4 | length 18.2
  Top w0.203: C3B.2@80.369,73.905 80.394,73.88 81.844,73.88 81.524,73.56 RN2B.4@81.524,71.855 81.524,70.555 82.003,70.076 82.223,70.076 82.544,69.755 83.294,69.755 v1(83.832,69.217) 84.369,68.68 86.869,68.68 87.394,69.205 v1(88.244,69.205) ; v1(84.619,70.105) 85.269,70.755 85.269,71.79 RN2B.1@85.334,71.855 ; v1(88.248,68.109) 88.269,68.088 IC1B.3@88.269,66.909
  L3 w0.203: v1(83.832,69.217) 83.832,69.318 v1(84.619,70.105) ; v1(88.244,69.205) 88.248,69.201 v1(88.248,68.109)
NetC3C_2: C3C.2 IC1C.3 R7C.2 RN2C.1 RN2C.4 | length 18.1
  Top w0.203: C3C.2@80.382,63.861 80.388,63.855 R7C.2@81.894,63.855 81.537,63.498 RN2C.4@81.537,61.812 81.537,60.53 82.034,60.033 82.235,60.033 82.557,59.711 83.307,59.711 84.382,58.636 86.882,58.636 87.407,59.161 v1(88.257,59.161) ; v1(84.544,60.23) 84.544,60.53 85.347,61.333 RN2C.1@85.347,61.812 ; v1(88.261,58.065) 88.282,58.045 IC1C.3@88.282,56.865
  L3 w0.203: v1(83.694,59.38) v1(84.544,60.23) ; v1(88.257,59.161) 88.261,59.157 v1(88.261,58.065)
NetC3D_2: C3D.2 IC1D.3 R7D.2 RN2D.1 RN2D.4 | length 18.2
  Top w0.203: C3D.2@80.369,53.905 80.469,53.805 R7D.2@81.894,53.805 81.524,53.435 RN2D.4@81.524,51.855 81.524,50.58 82.028,50.076 82.223,50.076 82.544,49.755 83.294,49.755 v1(83.719,49.33) 84.369,48.68 86.869,48.68 87.394,49.205 v1(88.244,49.205) ; v1(84.594,50.13) 85.334,50.87 RN2D.1@85.334,51.855 ; v1(88.248,48.109) 88.269,48.088 IC1D.3@88.269,46.909
  L3 w0.203: v1(83.719,49.33) 83.794,49.33 v1(84.594,50.13) ; v1(88.244,49.205) 88.248,49.201 v1(88.248,48.109)
NetC3E_2: C3E.2 IC1E.3 R7E.2 RN2E.1 RN2E.4 | length 18.3
  Top w0.203: C3E.2@80.369,43.905 80.394,43.88 R7E.2@81.894,43.88 81.524,43.51 RN2E.4@81.524,41.855 81.524,40.555 82.003,40.076 82.223,40.076 82.544,39.755 83.294,39.755 84.369,38.68 86.869,38.68 87.394,39.205 v1(88.244,39.205) ; v1(84.619,40.005) 85.294,40.68 85.294,41.815 RN2E.1@85.334,41.855 ; v1(88.248,38.109) 88.269,38.088 IC1E.3@88.269,36.909
  L3 w0.203: v1(83.794,39.33) 83.944,39.33 v1(84.619,40.005) ; v1(88.244,39.205) 88.248,39.201 v1(88.248,38.109)
NetC3F_2: C3F.2 IC1F.3 R7F.2 RN2F.1 RN2F.4 | length 18.4
  Top w0.203: C3F.2@80.369,33.905 R7F.2@81.869,33.905 81.524,33.56 RN2F.4@81.524,31.855 81.524,30.3 81.748,30.076 82.223,30.076 82.544,29.755 83.294,29.755 84.369,28.68 86.869,28.68 87.394,29.205 v1(88.244,29.205) ; v1(84.619,30.005) 85.334,30.72 RN2F.1@85.334,31.855 ; v1(88.248,28.109) 88.269,28.088 IC1F.3@88.269,26.909
  L3 w0.203: v1(83.929,29.155) 83.929,29.315 v1(84.619,30.005) ; v1(88.244,29.205) 88.248,29.201 v1(88.248,28.109)
NetC3G_2: C3G.2 IC1G.3 R7G.2 RN2G.1 RN2G.4 | length 18.4
  Top w0.203: C3G.2@80.369,23.905 80.394,23.88 R7G.2@81.894,23.88 81.524,23.51 RN2G.4@81.524,21.855 81.524,20.3 81.748,20.076 82.223,20.076 82.544,19.755 83.294,19.755 v1(83.744,19.305) 84.369,18.68 86.869,18.68 87.394,19.205 v1(88.244,19.205) ; v1(84.619,20.155) 85.334,20.87 RN2G.1@85.334,21.855 ; v1(88.248,18.109) 88.269,18.088 IC1G.3@88.269,16.909
  L3 w0.203: v1(83.744,19.305) 83.769,19.305 v1(84.619,20.155) ; v1(88.244,19.205) 88.248,19.201 v1(88.248,18.109)
NetC3H_2: C3H.2 IC1H.3 R7H.2 RN2H.1 RN2H.4 | length 18.3
  Top w0.203: C3H.2@80.394,13.88 R7H.2@81.869,13.88 81.524,13.535 RN2H.4@81.524,11.855 81.524,10.3 81.748,10.076 82.223,10.076 82.544,9.755 83.294,9.755 84.369,8.68 86.869,8.68 87.394,9.205 v1(88.244,9.205) ; v1(84.669,10.255) 85.334,10.92 RN2H.1@85.334,11.855 ; v1(88.248,8.109) 88.269,8.088 IC1H.3@88.269,6.909
  L3 w0.203: v1(83.694,9.405) 83.819,9.405 v1(84.669,10.255) ; v1(88.244,9.205) 88.248,9.201 v1(88.248,8.109)
NetC12A_2: C12A.2 IC1A.5 R13A.2 | length 4
  Top w0.254: IC1A.5@88.919,81.309 88.919,83.655 C12A.2@88.744,83.83 89.119,84.205 R13A.2@89.974,84.205
NetC12B_2: C12B.2 IC1B.5 R13B.2 | length 4
  Top w0.254: IC1B.5@88.919,71.309 88.919,73.655 C12B.2@88.744,73.83 89.119,74.205 R13B.2@89.974,74.205
NetC12C_2: C12C.2 IC1C.5 R13C.2 | length 4
  Top w0.254: IC1C.5@88.932,61.265 88.932,63.611 C12C.2@88.757,63.786 89.132,64.161 R13C.2@89.987,64.161
NetC12D_2: C12D.2 IC1D.5 R13D.2 | length 4
  Top w0.254: IC1D.5@88.919,51.309 88.919,53.655 C12D.2@88.744,53.83 89.119,54.205 R13D.2@89.974,54.205
NetC12E_2: C12E.2 IC1E.5 R13E.2 | length 4
  Top w0.254: IC1E.5@88.919,41.309 88.919,43.655 C12E.2@88.744,43.83 89.119,44.205 R13E.2@89.974,44.205
NetC12F_2: C12F.2 IC1F.5 R13F.2 | length 4
  Top w0.254: IC1F.5@88.919,31.309 88.919,33.655 C12F.2@88.744,33.83 89.119,34.205 R13F.2@89.974,34.205
NetC12G_2: C12G.2 IC1G.5 R13G.2 | length 4
  Top w0.254: IC1G.5@88.919,21.309 88.919,23.655 C12G.2@88.744,23.83 89.119,24.205 R13G.2@89.974,24.205
NetC12H_2: C12H.2 IC1H.5 R13H.2 | length 4
  Top w0.254: IC1H.5@88.919,11.309 88.919,13.655 C12H.2@88.744,13.83 89.119,14.205 R13H.2@89.974,14.205
NetC40_1: C40.1 IC21.4 | length 1.9
  Top w0.203: C40.1@114.494,46.38 116.338,46.38 IC21.4@116.393,46.324
NetC42_1: C42.1 IC23.3 | length 1.8
  Top w0.127: IC23.3@121.544,42.419 122.728,42.419 123.14,42.007 C42.1@123.14,41.985
NetC46_1: C46.1 IC24.5 | length 1.9
  Top w0.127: C46.1@115.369,16.23 115.369,16.255 115.969,16.855 IC24.5@115.969,17.884
NetC49_2: C49.2 C50.1 L2.2 L3.1 | length 8
  Top w1.016: L3.1@117.5,73.4 117.52,73.38 C50.1@120.144,73.38 120.144,74.38 121.044,75.28 121.044,77.13 L2.2@121.944,78.03
NetC52_1: C52.1 C53.2 C54.2 C55.2 C56.2 C73.2 C74.2 C85.2 C86.2 IC25.1 IC28.2 IC31.2 L4.2 | length 29.1
  Top w0.152: IC31.2@137.691,59.52 v1(138.481,59.52)
  Top w0.381: v1(138.391,62.77) 138.523,62.77 C74.2@139.409,63.655 139.645,63.655 C74.2@139.904,63.915 ; v1(138.481,59.52) 138.481,59.48 C85.2@138.941,59.02 138.941,57.37 C86.2@139.041,57.27 ; IC28.2@141.142,63.915 C74.2@139.904,63.915 ; C55.2@150.653,62.901 150.653,63.076 149.06,64.669 149.06,65.139 147.802,66.397 141.149,66.397 140.963,66.211 140.963,66.042 C73.2@140.691,65.77 140.691,65.295 140.475,65.079 140.475,64.486 C74.2@139.904,63.915 ; L4.2@160.1,68.3 L4.2@160.2,68.2
  Top w0.508: C56.2@150.653,60.742 C55.2@150.653,62.901 150.865,63.113 152.66,63.113
  Top w0.762: IC25.1@152.154,70.245 IC25.1@152.489,70.245 ; C52.1@157.5,65.8 C52.1@157.5,66.075
  L3 w0.381: v1(138.391,62.77) 138.391,62.737 138.481,62.647 v1(138.481,59.52)
NetC59_2: C59.2 C60.2 L5.2 L6.1 | length 17.9
  Top w0.508: L6.1@117.4,64.375 122.194,64.375 ; C59.2@125.039,64.375 122.194,64.375 ; L5.2@125.944,57.03 123.595,57.03 122.194,58.431 122.194,62.4 122.194,64.375
NetC65_2: C65.2 D7.2 IC27.3 R59.2 R62.2 | length 8.1
  Top w0.152: R62.2@120.444,9.6 120.444,10.33 C65.2@121.194,11.08 122.364,11.08 R59.2@122.694,11.41 ; IC27.3@123.059,8.83 123.059,11.015 122.719,11.355 123.119,11.355 123.594,10.88 124.304,10.88 D7.2@124.444,10.74
NetC66_2: C66.2 D8.2 IC28.3 IC31.7 R64.1 | length 13.1
  Top w0.127: R64.1@135.291,62.795 135.316,62.77 135.378,62.77 135.441,62.77 135.378,62.707 135.05,62.379 135.05,60.791 135.235,60.606 135.504,60.606 IC31.7@135.591,60.52
  Top w0.254: R64.1@135.291,62.795 135.353,62.857 135.398,62.902 135.398,63.527 135.788,63.917 135.788,64.763 D8.2@135.781,64.77 ; D8.2@135.788,64.77 136.591,64.77 C66.2@137.391,63.97 137.641,63.72 137.641,62.27 137.718,62.193 138.776,62.193 139.233,62.649 139.987,62.649 140.363,63.025 140.363,63.27 140.508,63.415 IC28.3@141.142,63.415
NetC72_2: C72.2 D9.2 IC27.6 R67.1 | length 10.5
  Top w0.127: C72.2@121.644,-0.37 121.644,1.29 D9.2@121.554,1.38 121.719,1.38 122.579,2.24 122.579,2.412 122.837,2.671 123.01,2.671 123.059,2.72 IC27.6@123.059,3.43 123.059,4.92 123.469,5.33
  Top w0.152: 123.469,5.33 R67.1@127.194,5.33
NetC75_1: C75.1 IC30.3 | length 1.9
  Top w0.152: IC30.3@116.795,32.679 117.793,32.679 C75.1@118.444,33.33
NetC82_1: C82.1 IC32.4 | length 6.9
  Top w0.203: C82.1@111.894,27.63 111.894,26.68 112.923,25.651 115.892,25.651 116.121,25.88 117.149,25.88 IC32.4@117.244,25.975
NetC95_2: C95.2 IC36.22 | length 2.4
  Top w0.254: IC36.22@101.364,33.49 101.364,32.111 101.749,31.725 102.093,31.725 C95.2@102.21,31.608
NetC96_2: C96.2 IC36.9 | length 2.3
  Top w0.254: C96.2@95.069,36.366 95.464,36.761 96.748,36.761 96.844,36.665 IC36.9@97.189,36.665
NetC97_2: C97.2 IC36.6 | length 2.3
  Top w0.254: C97.2@95.069,37.995 95.239,38.165 96.055,38.165 96.135,38.085 97.109,38.085 IC36.6@97.189,38.165
NetC98_2: C98.2 IC36.45 | length 2.2
  Top w0.254: C98.2@100.915,43.321 101.364,42.871 IC36.45@101.364,41.34
NetC99_2: C99.2 IC36.8 R81.2 | length 25
  Top w0.152: IC36.8@97.189,37.165 96.24,37.165 96.194,37.12 94.26,37.12 93.694,36.554 93.694,34.271 95.797,32.168 95.797,31.277 96.564,30.51 97.965,30.51 98.084,30.391 98.084,24.74 100.122,22.702 C99.2@101.374,22.702 102.622,22.702 102.948,22.376 R81.2@102.948,21.408
NetC101_2: C101.2 IC33.2 IC34.2 R80.2 | length 9.1
  Top w0.127: IC33.2@98.194,14.434 98.194,13.035 98.863,12.366 101.739,12.366 102.151,12.778 102.151,12.803 102.361,13.013 R80.2@102.864,13.013 ; IC34.2@102.944,14.505 102.944,13.093 R80.2@102.864,13.013 ; v1(103.144,12.259) 103.144,12.36 103.012,12.492 R80.2@103.012,13.013 R80.2@102.864,13.013
NetC102_2: C102.2 IC33.6 IC34.6 R82.1 | length 12.9
  Top w0.152: IC33.6@98.194,18.834 98.301,18.727 98.301,17.711 98.526,17.486 102.146,17.486 102.415,17.217 103.1,17.217 v1(103.594,17.711) IC34.6@103.594,18.905 103.594,19.866 103.944,20.216 105.501,20.216 C102.2@105.694,20.409 105.694,19.63 106.199,19.125 R82.1@106.219,19.125 R82.1@106.239,19.125
NetC103_2: C103.2 IC35.3 RN3.1 RN3.5 | length 21.1
  Top w0.203: C103.2@100.944,65.58 99.569,65.58 99.294,65.305 99.294,63.86 RN3.5@99.144,63.71 99.074,63.78 97.769,63.78 97.09,63.101 97.09,58.009 98.444,56.655 IC35.3@99.694,56.655 101.294,56.655 102.344,57.705 102.344,59.255 102.989,59.9 RN3.1@104.544,59.9
NetC106_2: C106.2 IC35.5 RN4.3 RN4.5 | length 12
  Top w0.152: C106.2@97.194,54.13 100.894,54.13 ; IC35.5@104.094,56.005 102.769,56.005 100.894,54.13 ; RN4.3@104.719,52.89 102.134,52.89 100.894,54.13
NetC109_2: C109.2 IC39.6 IC39.7 R112.2 | length 14.3
  Top w0.508: IC39.6@169.4,3.865 168.115,3.865 167.6,4.38 167.6,5.135 ; IC39.7@169.4,5.135 167.6,5.135 ; R112.2@172.13,11.4 171.175,11.4 170.3,10.525 C109.2@170.3,10.3 170.3,9.25 170,8.95 168.2,8.95 167.6,8.35 167.6,5.135
NetC111_2: C111.2 IC39.5 | length 1.9
  Top w0.508: IC39.5@169.4,2.595 171.235,2.595 C111.2@171.28,2.55
NetC112_2: C112.2 D15.1 R113.2 | length 2.5
  Top w0.508: R113.2@160,9.63 160.46,9.63 ; D15.1@160.4,8.25 160.4,9.57 160.46,9.63 ; C112.2@161.1,9.65 161.08,9.63 160.46,9.63
NetC116_1: C116.1 FL1.3 J10.1 J10.2 | length 37.7
  Top w1: C116.1@189.4,84.1 189.4,85.274
  Top w1.27: FL1.3@184.875,85.35 189.324,85.35 ; 189.4,85.35 192.35,85.35 194.9,82.8 194.9,76.102 J10.1@202.235,68.767 J10.2@202.235,64.567
  L3 w1.27: J10.2@202.235,64.567 J10.1@202.235,68.767
NetC116_2: C116.2 FL1.1 J10.3 J10.4 | length 30.7
  Top w1: 189.4,81.117 C116.2@189.4,82.3
  Top w1.27: FL1.1@184.875,81.05 189.333,81.05 ; 189.4,81.05 191.65,81.05 192.8,79.9 192.8,72.702 J10.3@196.735,68.767 J10.4@196.735,64.567
  L3 w1.27: J10.4@196.735,64.567 J10.3@196.735,68.767
NetD10_1: D10.1 IC28.7 IC33.1 IC34.1 R69.1 R157.1 | length 151.3
  Top w0.152: IC33.1@96.924,14.434 96.924,15.584 97.013,15.673 102.15,15.673 102.343,15.48 ; IC34.1@102.343,14.578 102.343,15.48 ; v1(118.194,25.13) 118.417,24.907 118.417,24.608 118.28,24.472 118.28,16.869 117.518,16.106 117.518,15.48 117.182,15.144 107.966,15.144 106.93,16.18 102.923,16.18 102.343,15.601 102.343,15.48 ; v1(121.944,25.13) 121.944,25.172 121.666,25.45 121.666,30.566 122.5,31.4 123.3,31.4 125.194,33.294 125.194,35.777 127.1,37.683 127.1,43.49 125.834,44.756 D10.1@125.834,45.88 127.78,45.88 v1(127.8,45.9) ; v1(133.841,54.729) 133.861,54.729 134.374,55.242 139.869,55.242 141.594,56.967 141.594,58.16 142.057,58.623 142.931,58.623 143.42,59.111 143.42,59.853 143.611,60.044 R69.1@143.611,61.02 ; v1(140.59,23.89) 140.59,22.764 153.7,9.654 153.7,-0.725 154.2,-1.225 161.775,-1.225 R157.1@162.8,-0.2
  Top w0.254: IC28.7@143.242,62.915 143.611,62.915 143.611,62.881 143.674,62.819 143.698,62.819 143.846,62.67 143.846,61.255 R69.1@143.611,61.02
  L3 w0.152: v1(127.8,45.9) 129.175,45.9 133.841,50.566 v1(133.841,54.729)
  Bot w0.152: v1(118.194,25.13) v1(121.944,25.13) 123.37,25.13 124.61,23.89 v1(140.59,23.89)
NetD10_2: D10.2 IC21.5 IC24.4 IC26.3 IC27.1 R53.1 R67.2 | length 71.7
  Top w0.152: v1(112.3,17.525) 112.659,17.884 IC24.4@113.169,17.884 ; v1(119.944,24.63) 120.044,24.53 IC26.3@120.044,23.83 ; IC21.5@121.793,46.324 121.793,45.352 122.266,44.88 123.044,44.88 ; D10.2@123.554,45.88 123.554,45.39 123.044,44.88 ; R67.2@127.444,7.18 R67.2@127.194,6.93 125.794,6.93 125.599,7.125 IC27.1@125.599,8.83 125.599,10.085 126.457,10.943 126.457,13.367 125.762,14.062 124.812,14.062 124.219,14.655 124.219,15.955 R53.1@124.219,19.08 124.219,19.805 125.444,21.03 125.444,24.48 124.794,25.13 122.585,25.13 122.132,24.677 121.756,24.677 121.397,25.036 121.397,25.323 121.386,25.334 121.386,31.038 122.228,31.88 122.844,31.88 124.702,33.738 124.702,35.742 124.702,36.138 126.528,37.964 126.528,42.716 125.33,43.914 124.01,43.914 123.044,44.88
  L3 w0.152: v1(116.999,24.482) 119.251,24.482 119.286,24.447 119.413,24.447 119.596,24.63 v1(119.944,24.63) 121.709,24.63 121.836,24.503 v1(121.86,24.503)
  Bot w0.152: v1(112.3,17.525) 112.679,17.525 113.153,17.999 113.153,22.639 114.903,24.389 116.91,24.389 116.999,24.479 v1(116.999,24.482)
NetD11_4: D11.4 J8.K2 R98.2 | length 16.3
  Top w0.127: R98.2@186.37,1.1 188.119,1.1 189.269,-0.05 D11.4@190.575,-0.05 190.575,0.75 190.875,1.05 197.3,1.05 198.146,0.204 200.043,0.204 200.469,0.63 J8.K2@200.469,0.95
NetD11_5: D11.5 J8.I2 R95.2 | length 19.5
  Top w0.127: R95.2@186.37,0.1 188,0.1 189.025,-0.925 191,-0.925 191.225,-0.7 D11.5@191.225,-0.05 191.225,0.55 191.425,0.75 193.1,0.75 193.5,0.35 197.075,0.35 197.475,-0.05 202.269,-0.05 J8.I2@203.269,0.95
NetD11_6: D11.6 J8.H2 R93.2 | length 20.2
  Top w0.127: R93.2@186.37,-0.9 188.12,-0.9 188.57,-1.35 191.45,-1.35 191.875,-0.925 D11.6@191.875,-0.05 192.475,-0.05 192.734,-0.309 203.41,-0.309 J8.H2@204.669,0.95
NetD13_1: D13.1 J8.G3 R92.2 | length 23.3
  Top w0.127: R92.2@186.37,10.5 191.47,10.5 191.875,10.095 D13.1@191.875,9.05 192.925,9.05 197.771,4.204 200.944,4.204 201.298,3.85 205.069,3.85 J8.G3@205.969,2.95
NetD13_3: D13.3 J8.J3 R96.2 | length 19.3
  Top w0.127: R96.2@186.37,9.5 188.9,9.5 189.385,9.015 190.58,9.015 190.58,8.409 190.839,8.15 192.85,8.15 197.05,3.95 200.769,3.95 J8.J3@201.769,2.95
  Top w0.203: v1(190.572,9.9) 190.58,9.892 D13.3@190.58,9.05
NetD13_4: D13.4 J8.K3 R97.2 | length 16.7
  Top w0.127: R97.2@186.37,7.5 188.609,7.5 189.259,6.85 D13.4@190.575,6.85 190.575,5.459 190.838,5.196 193.829,5.196 195.329,3.696 199.623,3.696 J8.K3@200.369,2.95
NetD13_6: D13.6 J8.H3 R48.2 | length 20.9
  Top w0.127: R48.2@186.37,8.5 188.675,8.5 189.425,7.75 191.655,7.75 191.875,7.53 D13.6@191.875,6.85 v1(192.575,6.85)
  L3 w0.127: v1(192.575,6.85) 193.03,6.85 195.93,3.95 203.569,3.95 J8.H3@204.569,2.95
NetD14_2: D14.2 D15.2 IC39.2 | length 4.6
  Top w0.508: D15.2@160.4,6.55 D14.2@162,6.55 162,5.8 162.665,5.135 IC39.2@164,5.135
NetD24_1: D24.1 R38.1 | length 5.2
  Top w0.254: v1(-0.5,83.3) R38.1@0.5,83.3
  Bot w0.254: D24.1@-4.49,82.8 -1,82.8 v1(-0.5,83.3)
NetIC1A_1: IC1A.1 R6A.1 RN1A.7 RN2A.7 | length 19.7
  Top w0.203: RN1A.7@77.288,81.857 77.288,80.611 78.344,79.555 82.277,79.555 82.407,79.425 82.91,79.425 84.064,78.27 ; RN2A.7@84.064,76.455 84.064,78.27 ; IC1A.1@86.969,76.909 IC1A.1@86.969,77.506 ; R6A.1@90.603,77.486 90.073,77.486 89.853,77.706 89.793,77.706 88.815,78.684 87.421,78.684 86.969,78.232 IC1A.1@86.969,77.506 ; 84.064,78.27 84.103,78.309 85.067,78.309 85.665,77.711 85.665,77.67 85.829,77.506 IC1A.1@86.969,77.506
NetIC1A_2: IC1A.2 RN1A.2 RN1A.3 | length 15
  Top w0.203: v1(77.269,78.155) 77.269,76.477 RN1A.2@77.288,76.457 ; RN1A.3@78.558,76.457 78.558,78.169 v1(78.569,78.18) ; IC1A.2@87.619,76.909 v1(87.619,78.205)
  L3 w0.203: v1(77.269,78.155) 77.319,78.205 78.292,78.205 ; v1@78.569,78.151 79.74,78.151 79.794,78.205 82.703,78.205 82.731,78.177 84.539,78.177 84.671,78.309 85.067,78.309 85.199,78.177 87.591,78.177 v1(87.619,78.205)
NetIC1A_6: IC1A.6 RN2A.2 RN2A.3 | length 11.1
  Top w0.203: RN2A.3@82.794,81.855 82.794,80.29 82.929,80.155 83.679,80.155 ; RN2A.2@84.064,81.855 83.929,81.72 83.929,80.405 83.679,80.155 ; IC1A.6@88.269,81.309 88.269,79.934 87.944,79.609 87.465,79.609 87.391,79.535 87.257,79.535 86.877,79.155 84.679,79.155 83.679,80.155
NetIC1A_7: IC1A.7 R12A.1 RN2A.6 | length 13
  Top w0.203: RN2A.6@82.794,76.455 82.794,78.52 v1(82.929,78.655) ; v1(85.679,79.905) 87.294,79.905 87.619,80.23 IC1A.7@87.619,81.309 87.619,82.48 v1(87.594,82.505) ; v1(89.719,82.58) 89.815,82.676 R12A.1@90.603,82.676
  L3 w0.203: v1(82.929,78.655) 84.429,78.655 v1(85.679,79.905) ; v1(87.594,82.505) 89.644,82.505 v1(89.719,82.58)
NetIC1B_1: IC1B.1 R6B.1 RN1B.7 RN2B.7 | length 19.7
  Top w0.203: RN1B.7@77.288,71.857 77.288,70.611 78.344,69.555 82.277,69.555 82.407,69.425 82.91,69.425 84.064,68.27 ; RN2B.7@84.064,66.455 84.064,68.27 ; IC1B.1@86.969,66.909 IC1B.1@86.969,67.506 ; R6B.1@90.603,67.486 90.073,67.486 89.853,67.706 89.793,67.706 88.815,68.684 87.421,68.684 86.969,68.232 IC1B.1@86.969,67.506 ; 84.064,68.27 84.103,68.309 85.067,68.309 85.665,67.711 85.665,67.67 85.829,67.506 IC1B.1@86.969,67.506
NetIC1B_2: IC1B.2 RN1B.2 RN1B.3 | length 15
  Top w0.203: v1(77.269,68.155) 77.269,66.477 RN1B.2@77.288,66.457 ; RN1B.3@78.558,66.457 78.558,68.169 v1(78.569,68.18) ; IC1B.2@87.619,66.909 v1(87.619,68.205)
  L3 w0.203: v1(77.269,68.155) 77.319,68.205 78.292,68.205 ; v1@78.569,68.151 79.74,68.151 79.794,68.205 82.703,68.205 82.731,68.177 84.539,68.177 84.671,68.309 85.067,68.309 85.199,68.177 87.591,68.177 v1(87.619,68.205)
NetIC1B_6: IC1B.6 RN2B.2 RN2B.3 | length 11.1
  Top w0.203: RN2B.3@82.794,71.855 82.794,70.29 82.929,70.155 83.679,70.155 ; RN2B.2@84.064,71.855 83.929,71.72 83.929,70.405 83.679,70.155 ; IC1B.6@88.269,71.309 88.269,69.934 87.944,69.609 87.465,69.609 87.391,69.535 87.257,69.535 86.877,69.155 84.679,69.155 83.679,70.155
NetIC1B_7: IC1B.7 R12B.1 RN2B.6 | length 13
  Top w0.203: RN2B.6@82.794,66.455 82.794,68.52 v1(82.929,68.655) ; v1(85.679,69.905) 87.294,69.905 87.619,70.23 87.619,72.48 v1(87.594,72.505) ; v1(89.719,72.58) 89.815,72.676 R12B.1@90.603,72.676
  L3 w0.203: v1(82.929,68.655) 84.429,68.655 v1(85.679,69.905) ; v1(87.594,72.505) 89.644,72.505 v1(89.719,72.58)
NetIC1C_1: IC1C.1 R6C.1 RN1C.7 RN2C.7 | length 19.7
  Top w0.203: RN1C.7@77.301,61.813 77.301,60.567 78.357,59.511 82.29,59.511 82.42,59.381 82.923,59.381 84.077,58.227 ; RN2C.7@84.077,56.412 84.077,58.227 ; IC1C.1@86.982,56.865 IC1C.1@86.982,57.462 ; R6C.1@90.616,57.442 90.086,57.442 89.866,57.662 89.805,57.662 88.828,58.64 87.433,58.64 86.982,58.188 IC1C.1@86.982,57.462 ; 84.077,58.227 84.115,58.265 85.08,58.265 85.677,57.667 85.677,57.626 85.841,57.462 IC1C.1@86.982,57.462